# EAGLE board Liberador de Rango Felino (EAGLE 7.6.0)

Size 73.58 x 190.39 mm. Coordinates in mm from the lower left corner, seen from the top.
Outline: 0,0 56.82,0 56.82,53.33 0,53.33 0,0
Copper layers (1*16): Top 0.035mm / dielectric 1.5mm / Bottom 0.035mm
Design rules "default": minimum track width 10mil, minimum drill 24mil, track to track 8mil, track to pad 8mil, pad to pad 8mil, via to via 8mil, smd to smd 8mil, copper to edge 40mil, drill to drill 8mil, minimum pad ring 10mil, minimum via ring 8mil, stop-mask expansion 4mil, vias tented up to drill 0mil, thermal gap 10mil

## Footprints (pad centres in the part's own frame; a part is rotated, then mirrored left to right if it is on the bottom)
0207/10 = drill 0.813 octagon: 1 -5.08,0; 2 5.08,0
PHOTORESISTOR-2.54 = drill 1 pad 1.5: P$1 -1.27,0; P$2 1.27,0
B25V = drill 0.813 long: A 2.54,0.635; E -2.54,0.635; S 0,0.635
TL1105 = drill 1 pad 1.676: 1 -2.25,3.25; 2 2.25,3.25; 3 -2.25,-3.25; 4 2.25,-3.25
1X3P-2.54-2.54-11.6-3.0-BLACK-MALE = drill 0.889 pad 1.651 square: 1 0,2.54 | drill 0.889 pad 1.651: 2 0,0; 3 0,-2.54
1X16P-2.54-2.54-11.6-3.0-BLACK-MALE = drill 0.889 pad 1.651 square: 1 0,19.05 | drill 0.889 pad 1.651: 2 0,16.51; 3 0,13.97; 4 0,11.43; 5 0,8.89; 6 0,6.35; 7 0,3.81; 8 0,1.27; 9 0,-1.27; 10 0,-3.81; 11 0,-6.35; 12 0,-8.89; 13 0,-11.43; 14 0,-13.97; 15 0,-16.51; 16 0,-19.05
ARDUINO_UNO = drill 1.016 pad 1.88: 0 63.5,50.8; 1 60.96,50.8; 2 58.42,50.8; 3 55.88,50.8; 3.3V 35.56,2.54; 4 53.34,50.8; 5 50.8,50.8; 5V 38.1,2.54; 6 48.26,50.8; 7 45.72,50.8; 8 41.656,50.8; 9 39.116,50.8; 10 36.576,50.8; 11 34.036,50.8; 12 31.496,50.8; 13 28.956,50.8; A0 50.8,2.54; A1 53.34,2.54; A2 55.88,2.54; A3 58.42,2.54; A4 60.96,2.54; A5 63.5,2.54; AREF 23.876,50.8; GND 26.416,50.8; GND. 43.18,2.54; GND.. 40.64,2.54; I/OREF 30.48,2.54; N/C 27.94,2.54; RESET 33.02,2.54; SCL 18.796,50.8; SDA 21.336,50.8; VIN 45.72,2.54 | hole 3.2: 66.04,7.62; 66.04,35.56; 15.24,50.8; 13.97,2.54

## Placement (x,y rotation side)
R1  220‎Ω  [0207/10]  5,35.48 0 top
R2  1.7k‎Ω  [0207/10]  5,162.48 0 top
R3  1k‎Ω  [0207/10]  5,60.88 0 top
R4  5k‎Ω  [0207/10]  5,86.28 0 top
R5  [PHOTORESISTOR-2.54]  5,124.38 0 top
R6  1.7k‎Ω  [0207/10]  5,111.68 0 top
R7  220‎Ω  [0207/10]  5,175.18 0 top
R8  [PHOTORESISTOR-2.54]  5,187.88 0 top
R9  [PHOTORESISTOR-2.54]  5,200.58 0 top  (outside the outline)
R10  5k‎Ω  [0207/10]  5,213.28 0 top  (outside the outline)
R11  5k‎Ω  [0207/10]  5,225.98 0 top  (outside the outline)
Rpot3  30k‎Ω  [B25V]  5,48.18 0 top
S2  [TL1105]  5,98.98 0 top
SERVO2  [1X3P-2.54-2.54-11.6-3.0-BLACK-MALE]  5,73.58 0 top
U4  [1X16P-2.54-2.54-11.6-3.0-BLACK-MALE]  5,22.78 0 top
U6  [1X16P-2.54-2.54-11.6-3.0-BLACK-MALE]  5,149.78 0 top
UArduino_Controlador  [ARDUINO_UNO]  5,10.08 0 top
UArduino_Mundo_Externo  [ARDUINO_UNO]  5,137.08 0 top

## Library data of the parts
R1-R11 Rpot3 S2 SERVO2 U4 U6 UArduino_Controlador UArduino_Mundo_Externo = AUTODESK_CIRCUITS_BREADBOARD

## Nets
N$1: R3.2 R4.2 R6.2 R10.2 R11.2 Rpot3.A SERVO2.1 U4.1 U4.5 U4.16 UArduino_Controlador.GND..
N$2: Rpot3.S UArduino_Controlador.A0
N$3: SERVO2.3 UArduino_Controlador.9
N$4: R3.1 S2.1 UArduino_Controlador.2
N$5: S2.4
N$6: S2.3
N$7: UArduino_Controlador.0 UArduino_Mundo_Externo.1
N$8: UArduino_Controlador.1 UArduino_Mundo_Externo.0
N$9: UArduino_Controlador.GND UArduino_Mundo_Externo.GND..
N$10: R2.2 U6.1 U6.5 U6.16 UArduino_Mundo_Externo.GND.
N$11: R7.2 U6.2 UArduino_Mundo_Externo.5V
N$12: R2.1 U6.3
N$13: U6.4 UArduino_Mundo_Externo.12
N$14: U6.6 UArduino_Mundo_Externo.11
N$15: R7.1 U6.15
N$16: U6.11 UArduino_Mundo_Externo.7
N$17: U6.12 UArduino_Mundo_Externo.6
N$18: U6.13 UArduino_Mundo_Externo.5
N$19: U6.14 UArduino_Mundo_Externo.4
N$20: R8.P$2 R10.1 UArduino_Controlador.A2
N$21: R9.P$2 R11.1 UArduino_Controlador.A3
N$22: R1.2 R5.P$1 R8.P$1 R9.P$1 Rpot3.E S2.2 SERVO2.2 U4.2 UArduino_Controlador.5V
N$23: R4.1 R5.P$2 UArduino_Controlador.A1
N$24: R6.1 U4.3
N$25: U4.4 UArduino_Controlador.12
N$26: U4.6 UArduino_Controlador.11
N$27: R1.1 U4.15
N$28: U4.11 UArduino_Controlador.7
N$29: U4.12 UArduino_Controlador.6
N$30: U4.13 UArduino_Controlador.5
N$31: U4.14 UArduino_Controlador.4

## Tracks (layer width: path | path; a pad name or v marks a point on that pad's centre or on a via)
N$1  (10 unrouted)
N$2  (1 unrouted)
N$3  (1 unrouted)
N$4  (2 unrouted)
N$7  (1 unrouted)
N$8  (1 unrouted)
N$9  (1 unrouted)
N$10  (4 unrouted)
N$11  (2 unrouted)
N$12  (1 unrouted)
N$13  (1 unrouted)
N$14  (1 unrouted)
N$15  (1 unrouted)
N$16  (1 unrouted)
N$17  (1 unrouted)
N$18  (1 unrouted)
N$19  (1 unrouted)
N$20  (2 unrouted)
N$21  (2 unrouted)
N$22  (8 unrouted)
N$23  (2 unrouted)
N$24  (1 unrouted)
N$25  (1 unrouted)
N$26  (1 unrouted)
N$27  (1 unrouted)
N$28  (1 unrouted)
N$29  (1 unrouted)
N$30  (1 unrouted)
N$31  (1 unrouted)